# Altium PCB Pallette v0.5.PcbDoc
Units mm, origin at the board's own origin, x right, y up, seen from the top; angles counter-clockwise.
Board outline 110 x 12 mm, 2 copper layers (Top Layer, Bottom Layer); 71 components, 34 nets, 228 pads, 132 vias.
Unrouted connection lines stored in the file: 17.
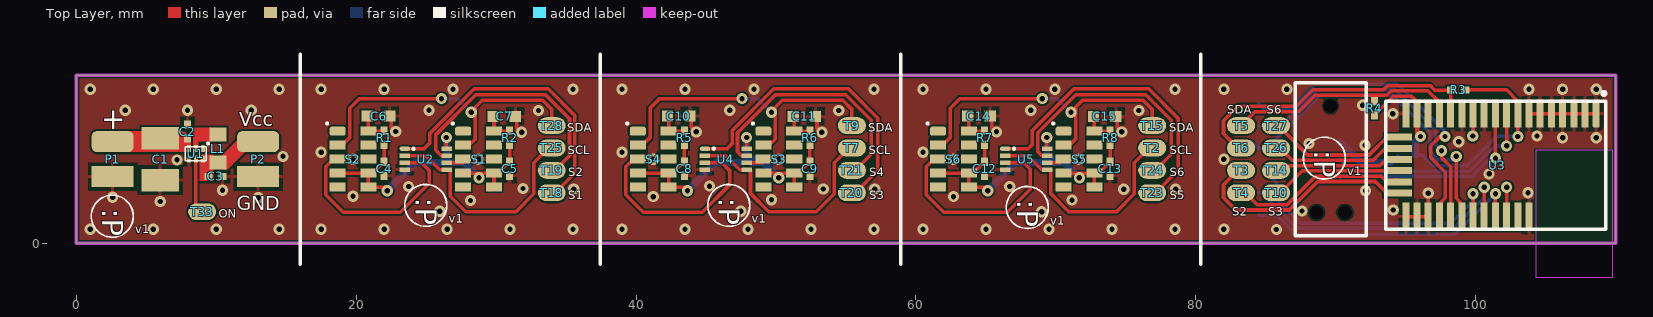
[diagram p0: Top Layer view]
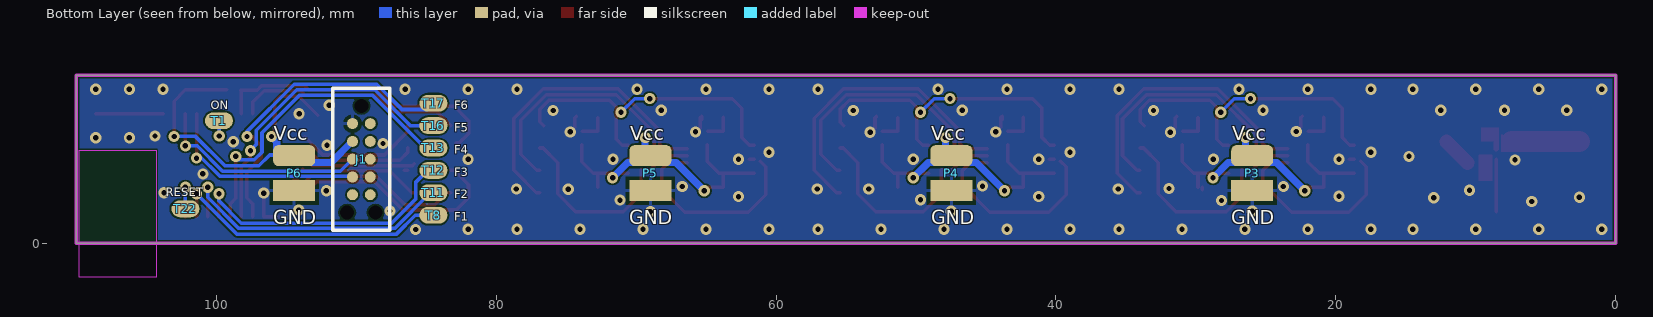
[diagram p1: Bottom Layer view, seen from below]

## Layer stack, top to bottom
Top Solder: solder mask 0.0102, Solder Resist, Dk 3.5
Top Layer: signal copper 0.0356
Dielectric 1: dielectric 0.32, FR-4, Dk 4.8
Bottom Layer: signal copper 0.0356
Bottom Solder: solder mask 0.0102, Solder Resist, Dk 3.5

## Board outline
0,0 110,0 110,12 0,12

## Design rules (kind name [scope] priority, off if disabled: settings)
Clearance [All] p1: gap=0.125
ComponentClearance [All] p1: gap=0.1 collisioncheckmode=3 verticalgap=0.1 showdistances=FALSE
MinimumSolderMaskSliver [All] p1: minsoldermaskwidth=0.125
PolygonConnect PolygonConnect_Vias [IsVia] p1: connectstyle=Direct reliefconductorwidth=0.254 reliefentries=4 polygonreliefangle="90 Angle" airgapwidth=0.254
PolygonConnect [All] p2: connectstyle=Relief reliefconductorwidth=0.254 reliefentries=4 polygonreliefangle="90 Angle" airgapwidth=0.254
RoutingVias [All] p1: holewidth=0.38 width=0.8 viastyle="Through Hole" minholewidth=0.356 minwidth=0.787 maxholewidth=0.711 maxwidth=1.27
SolderMaskExpansion [All] p1: expansion=0.102
Width [All] p1: maxlimit=2.54 minlimit=0.1 preferedwidth=0.254
28 further rules are at their usual default settings.

## Components (designator, comment, footprint, x,y, rotation, side; value= is the part's Value field where it differs from the comment)
C1 "100uF" 1411 6,6 r270 top
C2 "2.2uF" 0402 7.95,7.975 r270 top
C3 "2.2uF" 0402 9.95,4.775 r180 top
C4 "100nF" 0402 22,5.325 r90 top
C5 "100nF" 0402 30.975,5.325 r90 top
C6 "22uF" 0603 21.6,9.075 r180 top
C7 "22uF" 0603 30.575,9.05 r180 top
C8 "100nF" 0402 43.45,5.325 r90 top (schematic designator C4)
C9 "100nF" 0402 52.425,5.325 r90 top (schematic designator C5)
C10 "22uF" 0603 43.05,9.075 r180 top (schematic designator C6)
C11 "22uF" 0603 52.025,9.05 r180 top (schematic designator C7)
C12 "100nF" 0402 64.9,5.325 r90 top (schematic designator C4)
C13 "100nF" 0402 73.875,5.325 r90 top (schematic designator C5)
C14 "22uF" 0603 64.5,9.075 r180 top (schematic designator C6)
C15 "22uF" 0603 73.475,9.05 r180 top (schematic designator C7)
J1 "Header Program" TC2050-IDC-NL 89.625,6 r270 bottom
L1 "2.2uH" 0805 10.125,6.75 r270 top
P1 "Header Battery" "Battery Leads" 2.6,6 r0 top
P2 "Header Battery" "Battery Leads" 13,6 r0 top
P3 "Header Battery" "Battery Leads" 25.975,5 r180 bottom
P4 "Header Battery" "Battery Leads" 47.475,5 r180 bottom
P5 "Header Battery" "Battery Leads" 68.975,5 r180 bottom
P6 "Header Battery" "Battery Leads" 94.425,5 r180 bottom
R1 "30R" 0402 22,7.525 r270 top
R2 "30R" 0402 30.975,7.525 r270 top
R3 "4.7K" 0402 98.75,10.95 r0 top
R4 "4.7K" 0402 92.75,9.65 r270 top
R5 "30R" 0402 43.45,7.525 r270 top (schematic designator R1)
R6 "30R" 0402 52.425,7.525 r270 top (schematic designator R2)
R7 "30R" 0402 64.9,7.525 r270 top (schematic designator R1)
R8 "30R" 0402 73.875,7.525 r270 top (schematic designator R2)
S1 "Si1141-M01" SI1141-M01 28.75,6 r0 top
S2 "Si1141-M01" SI1141-M01 19.775,6 r0 top
S3 "Si1141-M01" SI1141-M01 50.2,6 r0 top (schematic designator S1)
S4 "Si1141-M01" SI1141-M01 41.225,6 r0 top (schematic designator S2)
S5 "Si1141-M01" SI1141-M01 71.65,6 r0 top (schematic designator S1)
S6 "Si1141-M01" SI1141-M01 62.675,6 r0 top (schematic designator S2)
T1 "TP 1.2X2MM" "TP 1.2x2MM" 99.8,8.75 r180 bottom
T2 "TP 1.2X2MM" "TP 1.2x2MM" 76.875,6.8 r0 top (schematic designator T25)
T3 "TP 1.2X2MM" "TP 1.2x2MM" 83.225,5.2 r0 top (schematic designator T1)
T4 "TP 1.2X2MM" "TP 1.2x2MM" 83.225,3.6 r0 top (schematic designator T1)
T5 "TP 1.2X2MM" "TP 1.2x2MM" 83.225,8.4 r0 top (schematic designator T1)
T6 "TP 1.2X2MM" "TP 1.2x2MM" 83.225,6.8 r0 top (schematic designator T1)
T7 "TP 1.2X2MM" "TP 1.2x2MM" 55.425,6.8 r0 top (schematic designator T25)
T8 "TP 1.2X2MM" "TP 1.2x2MM" 84.475,2 r0 bottom (schematic designator T1)
T9 "TP 1.2X2MM" "TP 1.2x2MM" 55.425,8.4 r0 top (schematic designator T28)
T10 "TP 1.2X2MM" "TP 1.2x2MM" 85.725,3.6 r0 top
T11 "TP 1.2X2MM" "TP 1.2x2MM" 84.475,3.6 r0 bottom
T12 "TP 1.2X2MM" "TP 1.2x2MM" 84.475,5.2 r0 bottom
T13 "TP 1.2X2MM" "TP 1.2x2MM" 84.475,6.8 r0 bottom
T14 "TP 1.2X2MM" "TP 1.2x2MM" 85.725,5.2 r0 top
T15 "TP 1.2X2MM" "TP 1.2x2MM" 76.875,8.4 r0 top (schematic designator T28)
T16 "TP 1.2X2MM" "TP 1.2x2MM" 84.475,8.4 r0 bottom
T17 "TP 1.2X2MM" "TP 1.2x2MM" 84.475,10 r0 bottom
T18 "TP 1.2X2MM" "TP 1.2x2MM" 33.975,3.6 r0 top
T19 "TP 1.2X2MM" "TP 1.2x2MM" 33.975,5.2 r0 top
T20 "TP 1.2X2MM" "TP 1.2x2MM" 55.425,3.6 r0 top (schematic designator T18)
T21 "TP 1.2X2MM" "TP 1.2x2MM" 55.425,5.2 r0 top (schematic designator T19)
T22 "TP 1.2X2MM" "TP 1.2x2MM" 102.2,2.45 r180 bottom
T23 "TP 1.2X2MM" "TP 1.2x2MM" 76.875,3.6 r0 top (schematic designator T18)
T24 "TP 1.2X2MM" "TP 1.2x2MM" 76.875,5.2 r0 top (schematic designator T19)
T25 "TP 1.2X2MM" "TP 1.2x2MM" 33.975,6.8 r0 top
T26 "TP 1.2X2MM" "TP 1.2x2MM" 85.725,6.8 r0 top
T27 "TP 1.2X2MM" "TP 1.2x2MM" 85.725,8.4 r0 top
T28 "TP 1.2X2MM" "TP 1.2x2MM" 33.975,8.4 r0 top
T33 "TP 1.2X2MM" "TP 1.2x2MM" 9,2.25 r0 top
U1 "TPS62730" 6-UFDFN 8.55,6.375 r180 top
U2 "74LVC2G125" VSSOP8 24.975,6 r270 top
U3 "BLE113" BLE113-A 101.525,5.575 r270 top
U4 "74LVC2G125" VSSOP8 46.425,6 r270 top (schematic designator U2)
U5 "74LVC2G125" VSSOP8 67.875,6 r270 top (schematic designator U2)

## Footprints (in the part's own frame and the unit in brackets; to place one, negate y for a bottom-side part, rotate by r counter-clockwise, add the part's x,y. Pads: shape width x height; smd on the part's side, far side on the other; paste and mask are expansions set on the pad)
6-UFDFN [mm] "Body 1.5x1.0mm"
  rrect50% 0.3x0.5 smd mask+0.05: 1(-0.5,-0.375)
  rect 0.3x0.5 smd mask+0.05: 2(0,-0.375) 3(0.5,-0.375) 4(0.5,0.375) 5(0,0.375) 6(-0.5,0.375)
  silkscreen extent -0.9,-0.77 0.75,0.5, body extent -0.75,-0.5 0.75,0.5, height 0.6
0402 [mm] "Body 1.0x0.5mm, IPC High Density"
  rect 0.6x0.5 smd: 1(-0.5,0) 2(0.5,0)
  body extent -0.55,-0.3 0.55,0.3, height 1.3
0603 [mm] "Body 1.6x0.8mm, IPC High Density"
  rect 0.8x0.8 smd: 1(-0.8,0) 2(0.8,0)
  body extent -0.81,-0.46 0.81,0.46, height 1.3
0805 [mm] "Body 2.0x1.25mm, IPC High Density"
  rect 1x1.2 smd: 1(-1,0) 2(1,0)
  body extent -1.02,-0.65 1.02,0.65, height 1.3
1411 [mm] "Body 3.5x2.8mm, IPC High Density"
  rect 1.6x2.7 smd: 1(-1.5,0) 2(1.5,0)
  body extent -1.52,-1.4 1.52,1.4, height 1.3
"Battery Leads" [mm]
  rrect50% 3x1.5 smd paste-1.524: 1(0,1.25)
  rect 3x1.5 smd paste-1.524: 2(0,-1.25)
BLE113-A [mm] "Body 15.725x9.15mm"
  rrect50% 2x0.5 smd: 1(-3.675,7.075)
  rect 2x0.5 smd: 2(-3.675,6.275) 3(-3.675,5.475) 4(-3.675,4.675) 5(-3.675,3.875) 6(-3.675,3.075) 7(-3.675,2.275) 8(-3.675,1.475) 9(-3.675,0.675) 10(-3.675,-0.125) 11(-3.675,-0.925) 12(-3.675,-1.725) 13(-3.675,-2.525) 14(-3.675,-3.325) 15(-3.675,-4.125) 16(-3.675,-4.925) 17(-3.675,-5.725) 18(-3.675,-6.525) 25(3.675,-6.525) 26(3.675,-5.725) 27(3.675,-4.925) 28(3.675,-4.125) 29(3.675,-3.325) 30(3.675,-2.525) 31(3.675,-1.725) 32(3.675,-0.925) 33(3.675,-0.125) 34(3.675,0.675) 35(3.675,1.475) 36(3.675,2.275)
  rect 0.5x2 smd: 19(-2,-7.075) 20(-1.2,-7.075) 21(-0.4,-7.075) 22(0.4,-7.075) 23(1.2,-7.075) 24(2,-7.075)
  Keep-Out Layer region: -1.075,2.75 8.025,2.75 8.025,8.25 -1.075,8.25
  silkscreen extent -5.25,-7.97 4.57,7.75, body extent -4.57,-7.97 4.57,7.75, height 1.9
SI1141-M01 [mm] "Body 4.9x2.85mm"
  rrect50% 1.15x0.65 smd: 1(-1.1,2)
  rect 1.15x0.65 smd: 2(-1.1,1) 3(-1.1,0) 4(-1.1,-1) 5(-1.1,-2) 6(1.1,-2) 7(1.1,-1) 8(1.1,0) 9(1.1,1) 10(1.1,2)
  silkscreen extent -1.87,2.53 -1.83,2.57, body extent -1.43,-2.45 1.43,2.45, height 1.3
TC2050-IDC-NL [mil] "Programming pads"
  round 0 hole 39 unplated: 0(-150,0) 0(150,-40) 0(150,40)
  round 31 smd paste-50: 1(-100,-25) 2(-50,-25) 3(0,-25) 4(50,-25) 5(100,-25) 6(100,25) 7(50,25) 8(0,25) 9(-50,25) 10(-100,25)
  silkscreen extent -200,-80 200,80
"TP 1.2x2MM" [mm] "Body 1.2x2mm"
  oval 2x1.2 smd paste-10: 1(0,0)
VSSOP8 [mm] "Body 2.1x2.4mm"
  oval 0.3x0.75 smd mask+0.05: 1(-0.75,-1.5)
  rect 0.3x0.75 smd mask+0.05: 2(-0.25,-1.5) 3(0.25,-1.5) 4(0.75,-1.5) 5(0.75,1.5) 6(0.25,1.5) 7(-0.25,1.5) 8(-0.75,1.5)
  silkscreen extent -0.77,-0.9 -0.73,-0.85, body extent -1,-1.2 1,1.2, height 1

## Part data
C1: library part "Cap Pol 100uF", "CAP TANT POLY 100UF 8V 1411"
C2 C3: library part "Cap 2.2uF", "CAP CER 2.2UF 6.3V X5R 0402"
C4 C5 C8 C9 C12 C13: library part "Cap 100nF", "CAP CER 0.1UF 10V X5R 0402"
C6 C7 C10 C11 C14 C15: library part "Cap 22uF", "CAP CER 22UF 6.3V X5R 0603"
J1: "PADS PROGRAMMING"
L1: library part "Ind 2.2uH", "FIXED IND 2.2UH 800MA 120 MOHM"
P1 P2 P3 P4 P5 P6: "PADS BATTERY"
R1 R2 R5 R6 R7 R8: library part "Res 30R", "RES SMD 30 OHM 1% 1/16W 0402"
R3 R4: library part "Res 4.7K", "RES SMD 4.7K OHM 1% 1/16W 0402"
S1 S2 S3 S4 S5 S6: "SENSOR IR PROXIMITY AMB LT 10QFN"
T1 T2 T3 T4 T5 T6 T7 T8 T9 T10 T11 T12 T13 T14 T15 T16 T17 T18 T19 T20 T21 T22 T23 T24 T25 T26 T27 T28 T33: "Test point"
U1: "IC DCDC CONV STP-DN SYNC LP 6SON"
U2 U4 U5: "IC BUS BUFF DVR TRI-ST DL 8VSSOP"
U3: "MODULE BT 4.0 BLE113 OTA"

## Via types
v1: diameter 0.8, hole 0.38, Top Layer to Bottom Layer, tented both sides, 132 vias

## Nets (pads, with @x,y where several pads share a name; then routed paths per layer and width w, separated by ;. In a path a pad name is that pad's centre, name@x,y a point inside that pad or via, vN(x,y) a via of type N, cw(c..) or ccw(c..) an arc to the next point about the centre after c; other vN are vias at no path point)
+2V1: C3.2 C4.2 C5.2 C8.2 C9.2 C12.2 C13.2 J1.2 L1.2 P2.1 P3.1 P4.1 P5.1 P6.1 R1.2 R2.2 R3.2 R4.2 R5.2 R6.2 R7.2 R8.2 S1.4 S1.6 S1.7 S2.4 S2.6 S2.7 S3.4 S3.6 S3.7 S4.4 S4.6 S4.7 S5.4 S5.6 S5.7 S6.4 S6.6 S6.7 U1.6 U2.8 U3.8 U3.17 U4.8 U5.8 | length 101.1
  Top Layer w0.254: S2.4 S2.7 ; R1.2 C4.2 21.175,5 S2.7 ; v1@22.225,4 S2.6 S2.7 ; v1@26.325,7.7 26.45,7.575 U2.8@26.45,6.75 ; S1.4 S1.7 ; S1.6@29.55,3.825 S1.6@29.55,3.975 ; S1.6 S1.7 ; R2.2 C5.2 30.15,5 S1.7 ; S4.4 S4.7 ; R5.2 C8.2 42.625,5 S4.7 ; v1@43.65,4 S4.6 S4.7 ; v1@47.775,7.7 47.9,7.575 U4.8@47.9,6.75 ; S3.4 S3.7 ; S3.6 S3.7 ; R6.2 C9.2 51.6,5 S3.7 ; S6.4 S6.7 ; R7.2 C12.2 64.075,5 S6.7 ; v1@65.1,4 S6.6 S6.7 ; v1@69.225,7.7 69.35,7.575 U5.8@69.35,6.75 ; S5.4 S5.7 ; S5.6 S5.7 ; R8.2 C13.2 73.05,5 S5.7 ; R4.2 94.102,10.502 95.398,10.502 95.8,10.1 U3.17 ; R3.2 102.2,10.95 103,10.15 U3.8 ; v1(103.005,7.625) U3.8@103.005,9.245
  Top Layer w0.32: v1@95.8,7.625 U3.17
  Top Layer w1.016: L1.2@10.6,5.75 P2.1@12.1,7.25
  Bottom Layer w0.254: v1(22.225,3.75) v1@22.375,3.75 ; P3.1@26.325,6.15 P3.1@26.475,6 ; v1(43.675,3.75) v1@43.825,3.75 ; P4.1@47.775,6.15 P4.1@47.925,6 ; v1(65.125,3.75) v1@65.275,3.75 ; P5.1@69.225,6.15 P5.1@69.375,6 ; P6.1@93.925,5.75 P6.1 ; P6.1@95.675,6.3 96.175,6.3 96.952,5.523 99.373,5.523 101.475,7.625 v1(103.005,7.625)
  Bottom Layer w0.508: v1(22.225,3.75) 24.225,5.75 27.7,5.75 v1@28.787,4.663 ; P3.1@26.45,6 v1@26.45,7.575 ; v1(43.675,3.75) 45.675,5.75 P4.1@47.475,5.75 ; P4.1@47.9,6.025 v1@47.9,7.6 ; P4.1@48.225,6 P4.1@48.5,6 ; P4.1@48.275,5.75 49.125,5.75 v1@50.225,4.65 ; v1(65.125,3.75) 67.125,5.75 P5.1@68.975,5.75 ; P5.1@69.225,5.75 70.6,5.75 v1(71.675,4.675) ; P5.1@69.35,6.025 v1@69.35,7.6 ; P5.1@69.725,6 P5.1@70,6 ; J1.2@90.285,7.27 91.805,5.75 P6.1@93.925,5.75 ; P6.1@95.675,6.3 95.675,7.25 v1(96.05,7.625)
  other v1: 28.775,4.675 50.2,4.675 26.45,7.55 47.9,7.55 69.35,7.55
FSR1: T8.1 U3.33 | length 20.3
  Top Layer w0.254: U3.33 v1(101.4,3.525)
  Bottom Layer w0.254: T8.1 85.764,2 87.114,0.65 98.525,0.65 v1(101.4,3.525)
FSR2: T11.1 U3.32 | length 20.9
  Top Layer w0.254: U3.32 v1(100.6,4)
  Bottom Layer w0.254: T11.1 84.7,3.6 87.25,1.05 98.375,1.05 100.6,3.275 v1(100.6,4)
FSR3: T12.1 U3.31 | length 19.9
  Top Layer w0.254: U3.31 v1(99.8,3.525)
  Bottom Layer w0.254: T12.1@84.925,5.175 85.727,4.373 85.727,3.173 87.471,1.429 98.204,1.429 99.8,3.025 v1(99.8,3.525)
FSR4: T13.1 U3.30 | length 23.6
  Top Layer w0.254: v1@98.6,6.175 98.6,3.2 99,2.8 U3.30
  Bottom Layer w0.254: T13.1@84.025,7.25 T13.1 85.05,6.8 88.825,10.575 94.05,10.575 96.725,7.9 96.725,6.5 97.277,5.948 v1@98.448,5.948 ; v1@98.448,6.048 v1(98.6,6.2)
FSR5: T16.1 U3.29 | length 21.7
  Top Layer w0.254: v1@97.45,6.7 v1(97.55,6.6) 97.55,6.125 98.204,5.471 98.204,1.904 U3.29
  Bottom Layer w0.254: T16.1 86.114,8.4 88.671,10.957 94.243,10.957 97.125,8.075 97.125,7.05 v1@97.562,6.613
FSR6: T17.1 U3.28 | length 23
  Top Layer w0.254: U3.28 97.4,2.825 97.825,3.25 97.825,5.075 96.775,6.125 96.775,6.955 97.445,7.625 v1(97.8,7.625)
  Bottom Layer w0.254: T17.1 84.925,9.55 86.728,9.55 88.528,11.35 94.425,11.35 97.8,7.975 v1(97.8,7.625)
GND: C1.2 C2.1 C3.1 C4.1 C5.1 C6.1 C7.1 C8.1 C9.1 C10.1 C11.1 C12.1 C13.1 C14.1 C15.1 J1.1 P1.2 P2.2 P3.2 P4.2 P5.2 P6.2 S1.8 S2.8 S3.8 S4.8 S5.8 S6.8 U1.4 U2.4 U3.1 U3.2 U3.3 U3.4 U3.5 U3.6 U3.7 U3.11 U3.13 U3.18 U3.25 U3.26 U3.27 U3.36 U4.4 U5.4 | length 16.5
  Top Layer w0.254: C6.1 22.502,8.973 22.502,8.298 v1(22.825,7.975) ; C7.1 31.477,8.948 31.477,8.248 31.8,7.925 v1(31.825,7.925) ; C10.1@43.85,8.825 C10.1 43.952,8.973 43.952,8.298 v1(44.3,7.95) ; C11.1 52.927,8.948 52.927,8.223 53.4,7.75 v1@53.271,7.621 ; C14.1@65.3,8.825 C14.1 65.402,8.973 65.402,8.223 ; C15.1 74.377,8.948 74.377,8.273 v1(74.7,7.95) ; U3.25 U3.26 U3.27 v1@96.6,3.725 ; U3.7 U3.6 U3.5 U3.4 U3.3 U3.2 U3.1
  other v1: 85.75,0.975 1,1 5.5,1 10,1 14.5,1 17.5,1 22,1 26.5,1 31,1 35.5,1 39,1 43.5,1 48,1 52.5,1 57,1 60.5,1 65,1 69.5,1 74,1 78.5,1 82,1 68.975,2.25 25.975,2.275 47.475,2.275 87.575,2.3 94.1,2.375 6,2.975 28.175,3.05 71.15,3.075 49.675,3.1 13,3.25 2.6,3.275 41.225,3.325 62.675,3.325 19.775,3.35 96.6,3.575 103.725,3.6 92.125,3.75 10.45,3.775 74.85,3.85 35.55,3.875 53.375,3.875 57.05,3.875 78.55,3.875 31.925,3.9 23.75,4.05 66.7,4.05 45.25,4.075 100.95,4.95 7.2,5.95 19.775,6 28.75,6 41.225,6 50.2,6 62.675,6 71.65,6 82,6 14.775,6.2 17.5,6.5 39,6.5 60.5,6.5 92.075,7 88.075,7.125 98.775,7.25 106.2,7.525 108.6,7.525 104.375,7.65 53.275,7.925 65.75,7.95 94.075,9.25 33.025,9.475 54.475,9.475 75.925,9.475 3.5,9.5 7.95,9.5 12.5,9.5 25.2,9.5 46.7,9.5 68.2,9.5 91.925,9.85 1,11 5.5,11 10,11 14.5,11 17.5,11 22,11 26.925,11 35.5,11 39,11 43.5,11 48.425,11 57,11 60.5,11 65,11 69.925,11 78.5,11 82,11 86.5,11 103.8,11 106.2,11 108.6,11
NetC6_2: C6.2 R1.1 S2.10 | length 2.1
  Top Layer w0.254: C6.2@20.875,9 S2.10 R1.1@21.975,8
NetC7_2: C7.2 R2.1 S1.10 | length 2.1
  Top Layer w0.254: C7.2@29.85,8.975 S1.10 R2.1@30.95,8
NetC10_2: C10.2 R5.1 S4.10 | length 2.1
  Top Layer w0.254: C10.2@42.325,9 S4.10 R5.1@43.425,8
NetC11_2: C11.2 R6.1 S3.10 | length 2.1
  Top Layer w0.254: C11.2@51.3,8.975 S3.10 R6.1@52.4,8
NetC14_2: C14.2 R7.1 S6.10 | length 2.1
  Top Layer w0.254: C14.2@63.775,9 S6.10 R7.1@64.875,8
NetC15_2: C15.2 R8.1 S5.10 | length 2.1
  Top Layer w0.254: C15.2@72.75,8.975 S5.10 R8.1@73.85,8
NetL1_1: L1.1 U1.2 | length 0.8
  Top Layer w0.4: U1.2 8.55,7.525
NetS1_3: S1.3 U2.6 | length 1.2
  Top Layer w0.254: U2.6@26.45,5.75 S1.3@27.65,5.75
NetS2_3: S2.3 U2.3 | length 14.6
  Top Layer w0.254: S2.3@18.225,5.85 17.825,5.45 17.825,3.45 19.075,2.2 23.15,2.2 25.232,4.282 25.232,5.193 24.675,5.75 U2.3@23.45,5.75 ; S2.3 S2.3@19.025,6
NetS3_3: S3.3 U4.6 | length 1.2
  Top Layer w0.254: U4.6@47.9,5.75 S3.3@49.1,5.75
NetS4_3: S4.3 U4.3 | length 14.7
  Top Layer w0.254: S4.3@39.675,5.85 39.275,5.45 39.275,3.45 40.525,2.2 44.725,2.2 46.682,4.157 46.682,5.193 46.125,5.75 U4.3@44.9,5.75 ; S4.3 S4.3@40.475,6
NetS5_3: S5.3 U5.6 | length 1.3
  Top Layer w0.254: U5.6@69.35,5.75 70.3,5.75 S5.3
NetS6_3: S6.3 U5.3 | length 15
  Top Layer w0.254: S6.3@61.125,5.85 60.725,5.45 60.725,3.45 61.975,2.2 66.525,2.2 68.175,3.85 68.175,5.275 67.7,5.75 U5.3@66.35,5.75 ; S6.3 S6.3@61.925,6
NetT22_1: T22.1 U3.34 | length 3.6
  Top Layer w0.254: U3.34 v1(102.2,4)
  Bottom Layer w0.254: T22.1 v1(102.2,4)
P1_7/DCDC: T1.1 T33.1 U1.5 U3.12 | length 6.4
  Top Layer w0.254: T33.1@8.55,2.25 U1.5 ; v1@99.8,7.675 U3.12
  Bottom Layer w0.254: v1(99.775,7.65) T1.1@99.775,8.725
P2_1/PROG: J1.4 U3.10 | length 14.9
  Top Layer w0.254: v1@101.4,5.925 U3.10
  Bottom Layer w0.254: J1.4@90.285,4.73 J1.4@90.294,4.721 ; J1.4@90.294,4.771 90.3,4.765 99.715,4.765 v1@101.238,6.288
  other v1: 101.4,6.075
P2_2/PROG: J1.3 U3.9 | length 15.3
  Top Layer w0.254: v1(102.2,6.95) U3.9
  Bottom Layer w0.254: J1.3@90.285,6 91.141,5.144 99.544,5.144 101.35,6.95 v1(102.2,6.95)
S1_EN: T3.1 T18.1 U2.1 U3.24 | length 37.4
  Top Layer w0.254: U2.1@23.45,6.75 24.85,6.75 25.275,7.175 25.275,7.858 28.442,11.025 33.725,11.025 35.625,9.125 35.625,5 34.225,3.6 T18.1 ; T3.1 83,5.2 81.973,4.173 81.973,3.247 82.851,2.369 86.669,2.369 88.705,4.405 92.814,4.405 U3.24@93.722,3.497
S2_EN: T4.1 T19.1 U2.7 U3.23 | length 30.6
  Top Layer w0.254: U2.7@26.45,6.25 26.094,6.25 25.675,6.669 25.675,7.722 28.553,10.6 33.525,10.6 35.246,8.879 35.246,6.246 34.205,5.205 T19.1@34,5.205 ; T4.1@83.9,3.6 T4.1 83.525,3.6 84.377,2.748 86.512,2.748 88.548,4.784 93.235,4.784 U3.23@93.697,4.322 ; U3.23@94.186,4.475 U3.23@94.45,4.475
S3_EN: T10.1 T20.1 U3.22 U4.1 | length 30.6
  Top Layer w0.254: U4.1@44.9,6.75 46.5,6.75 46.869,7.119 46.869,8.044 49.85,11.025 55.175,11.025 57.275,8.925 57.275,8.9 57.275,5.2 55.675,3.6 T20.1 ; T10.1 86.025,3.6 87.588,5.163 93.7,5.163 U3.22@93.825,5.288
S4_EN: T14.1 T21.1 U3.21 U4.7 | length 26.1
  Top Layer w0.254: U4.7@47.9,6.25 47.525,6.25 47.248,6.527 47.248,7.887 49.961,10.6 54.975,10.6 56.8,8.775 56.8,6.35 55.655,5.205 T21.1@55.45,5.205 ; T14.1@85.85,5.667 85.975,5.542 93.117,5.542 U3.21@93.6,6.025 ; T14.1@86.325,5.2 T14.1@86.572,5.2
S5_EN: T23.1 T26.1 U3.20 U5.1 | length 30.2
  Top Layer w0.254: U5.1@66.35,6.75 68.025,6.75 68.319,7.044 68.319,8.052 71.292,11.025 76.625,11.025 78.725,8.925 78.725,8.9 78.725,5.2 77.125,3.6 T23.1 ; T26.1@86.325,6.8 86.325,6.475 86.879,5.921 92.671,5.921 U3.20@93.6,6.85 ; U3.20@94.342,6.792 U3.20@94.35,6.8 ; U3.20@94.35,6.875 U3.20
S6_EN: T24.1 T27.1 U3.19 U5.7 | length 26.8
  Top Layer w0.254: U5.7@69.35,6.25 68.994,6.25 68.698,6.546 68.698,7.895 71.403,10.6 76.425,10.6 78.25,8.775 78.25,6.35 77.105,5.205 T24.1@76.9,5.205 ; T27.1@86.325,8.4 86.325,7.95 87.975,6.3 92.369,6.3 U3.19@93.672,7.603
SCL: R3.1 T2.1 T6.1 T7.1 T25.1 U2.2 U2.5 U3.14 U4.2 U4.5 U5.2 U5.5 | length 70.1
  Top Layer w0.254: U2.2@23.45,6.25 24.975,6.25 25.975,5.25 U2.5@26.45,5.25 ; U2.5@26.725,5.25 26.725,3.35 27.825,2.25 31.425,2.25 32.7,3.525 32.7,5.75 33.75,6.8 T25.1 ; U4.2@44.9,6.25 46.4,6.25 47.4,5.25 48.175,5.25 48.175,3.55 49.475,2.25 52.875,2.25 54.15,3.525 54.15,5.75 55.2,6.8 T7.1 ; U5.2@66.35,6.25 67.975,6.25 68.975,5.25 69.625,5.25 69.625,3.55 70.925,2.25 74.325,2.25 75.6,3.525 75.6,5.75 76.65,6.8 T2.1 ; T6.1@82.85,7.155 82.645,7.155 81.973,7.827 81.973,8.753 82.995,9.775 87.175,9.775 88.35,10.95 93.4,10.95 93.71,11.26 96.732,11.26 97.067,10.925 R3.1@98.25,10.925 ; U3.14 R3.1@98.2,10.9
SDA: R4.1 S1.2 S2.2 S3.2 S4.2 S5.2 S6.2 T5.1 T9.1 T15.1 T28.1 U3.15 | length 85.7
  Top Layer w0.254: S2.2 19,7 19.55,7.55 19.55,9.65 20.225,10.325 v1@26.025,10.325 ; v1@26.025,10.45 v1@26.125,10.55 ; S1.2 28.075,7 28.5,7.425 28.5,9.7 29,10.2 33.325,10.2 33.975,9.55 33.975,8.675 T28.1@33.7,8.4 ; S4.2 40.45,7 41,7.55 41,9.65 41.675,10.325 v1@47.475,10.325 ; v1@47.475,10.45 v1@47.575,10.55 ; S3.2 49.525,7 49.95,7.425 49.95,9.7 50.45,10.2 54.775,10.2 55.425,9.55 55.425,8.675 T9.1@55.15,8.4 ; S6.2 61.9,7 62.45,7.55 62.45,9.65 63.125,10.325 v1@69,10.325 ; v1@68.925,10.45 v1@69.025,10.55 ; S5.2 70.975,7 71.4,7.425 71.4,9.7 71.9,10.2 76.225,10.2 76.875,9.55 76.875,8.675 T15.1@76.6,8.4 ; T5.1 84.221,9.396 87.332,9.396 88.507,10.571 93.635,10.571 93.945,10.881 96.575,10.881 97.4,10.056 U3.15
  Bottom Layer w0.254: v1@26.125,10.325 27.25,10.325 v1(28.225,9.35) ; v1(47.575,10.325) 48.7,10.325 v1(49.675,9.35) ; v1(69.025,10.325) 70.1,10.325 v1(71.075,9.35)
  other v1: 26.1,10.325
VBAT: C1.1 C2.2 P1.1 U1.3 | length 4.8
  Top Layer w1.5: P1.1 7.448,7.25
pads on no net: J1.0 J1.5 J1.6 J1.7 J1.8 J1.9 J1.10 S1.1 S1.5 S1.9 S2.1 S2.5 S2.9 S3.1 S3.5 S3.9 S4.1 S4.5 S4.9 S5.1 S5.5 S5.9 S6.1 S6.5 S6.9 U1.1 U3.16 U3.35

## Polygon pours and split planes (outlines as drawn)
GND on Bottom Layer "Top Layer-GND" (solid, remove dead copper, pour order 22): -1.319,12.977 111.132,12.977 111.132,-1.336 30.943,-1.474 -1.319,-1.474
GND on Top Layer "Top Layer-No Net" (solid, remove dead copper, pour order 26): -0.425,12.575 -0.45,12.55 -0.45,-0.725 110.875,-0.725 110.9,-0.75 110.925,-0.725 110.925,12.7

## Keep-outs
Keep-Out Layer:
  the board outline again, w0.254

## Other copper
Top Layer:
  rectangle net NetL1_1: 8.35,7.25 9.625,8.25
  rectangle net +2V1: 8.825,4.425 9.825,6.325
  rectangle net VBAT: 7.25,6.5 8.125,7.2
  rectangle net VBAT: 8.075,6.5 8.2,7.775

## Silkscreen, mask and mechanical layers (free items; w line width, h text height)
Top Overlay:
  circle w0.127: c2.575,1.925 r1.5
  circle w0.127: c24.975,2.7 r1.5
  circle w0.127: c46.625,2.7 r1.5
  circle w0.127: c67.95,2.55 r1.5
  circle w0.127: c89.175,6.075 r1.5
  lines w0.254: 16,-1.5 16,13.5 ; 37.45,-1.5 37.45,13.5 ; 58.9,-1.5 58.9,13.5 ; 80.35,-1.5 80.35,13.5
  text "SDA" at 82.225,9.25 h0.6
  text "S6" at 85.05,9.25 h0.6
  text "Vcc" at 11.65,8.35 h1
  text "+" at 1.8,8.125 h1.52
  text "SDA" at 35.098,7.945 h0.6
  text "SDA" at 56.598,7.945 h0.6
  text "SDA" at 78.098,7.945 h0.6
  text ":P" at 88.45,6.625 h1.52 r270
  text "SCL" at 35.123,6.37 h0.6
  text "SCL" at 56.623,6.37 h0.6
  text "SCL" at 78.123,6.37 h0.6
  text "v1" at 90.825,4.85 h0.6
  text "S2" at 35.148,4.77 h0.6
  text "S4" at 56.648,4.77 h0.6
  text "S6" at 78.148,4.77 h0.6
  text ":P" at 24.25,3.25 h1.52 r270
  text ":P" at 45.9,3.25 h1.52 r270
  text "S1" at 35.148,3.145 h0.6
  text "S3" at 56.648,3.145 h0.6
  text "S5" at 78.148,3.145 h0.6
  text ":P" at 67.225,3.1 h1.52 r270
  text ":P" at 1.85,2.475 h1.52 r270
  text "GND" at 11.475,2.35 h1
  text "S2" at 82.6,1.975 h0.6
  text "S3" at 85.175,1.975 h0.6
  text "ON" at 10.198,1.82 h0.6
  text "v1" at 26.625,1.475 h0.6
  text "v1" at 48.275,1.475 h0.6
  text "v1" at 69.6,1.325 h0.6
  text "v1" at 4.225,0.7 h0.6
Bottom Overlay:
  text "ON" at 100.4,9.575 h0.6
  text "F6" at 83,9.55 h0.6
  text "F5" at 83,7.95 h0.6
  text "Vcc" at 27.4,7.35 h1
  text "Vcc" at 48.9,7.35 h1
  text "Vcc" at 70.4,7.35 h1
  text "Vcc" at 95.875,7.35 h1
  text "F4" at 83,6.375 h0.6
  text "F3" at 83,4.775 h0.6
  text "RESET" at 103.6,3.35 h0.6
  text "F2" at 83,3.2 h0.6
  text "F1" at 83,1.6 h0.6
  text "GND" at 27.475,1.35 h1
  text "GND" at 48.925,1.35 h1
  text "GND" at 70.5,1.35 h1
  text "GND" at 95.925,1.35 h1
Board Outline:
  the board outline again, w0.254
PCB Notes:
  text "Notes: / Mechanical 30 Layer is for V-Score" at 1.35,15.925 h1.52
Drill Drawing:
  text ".Legend" at 1.4,23.15 h1.52
V-Score:
  lines w0.254: 16,-1.5 16,13.5 ; 37.45,-1.5 37.45,13.5 ; 58.9,-1.5 58.9,13.5 ; 80.35,-1.5 80.35,13.5